# Altium PCB test_powersupply.pcbdoc
Units mm, origin at the board's own origin, x right, y up, seen from the top; angles counter-clockwise.
Board outline 32 x 52.5 mm, 2 copper layers (Top Layer, Bottom Layer); 28 components, 14 nets, 84 pads, 23 vias.
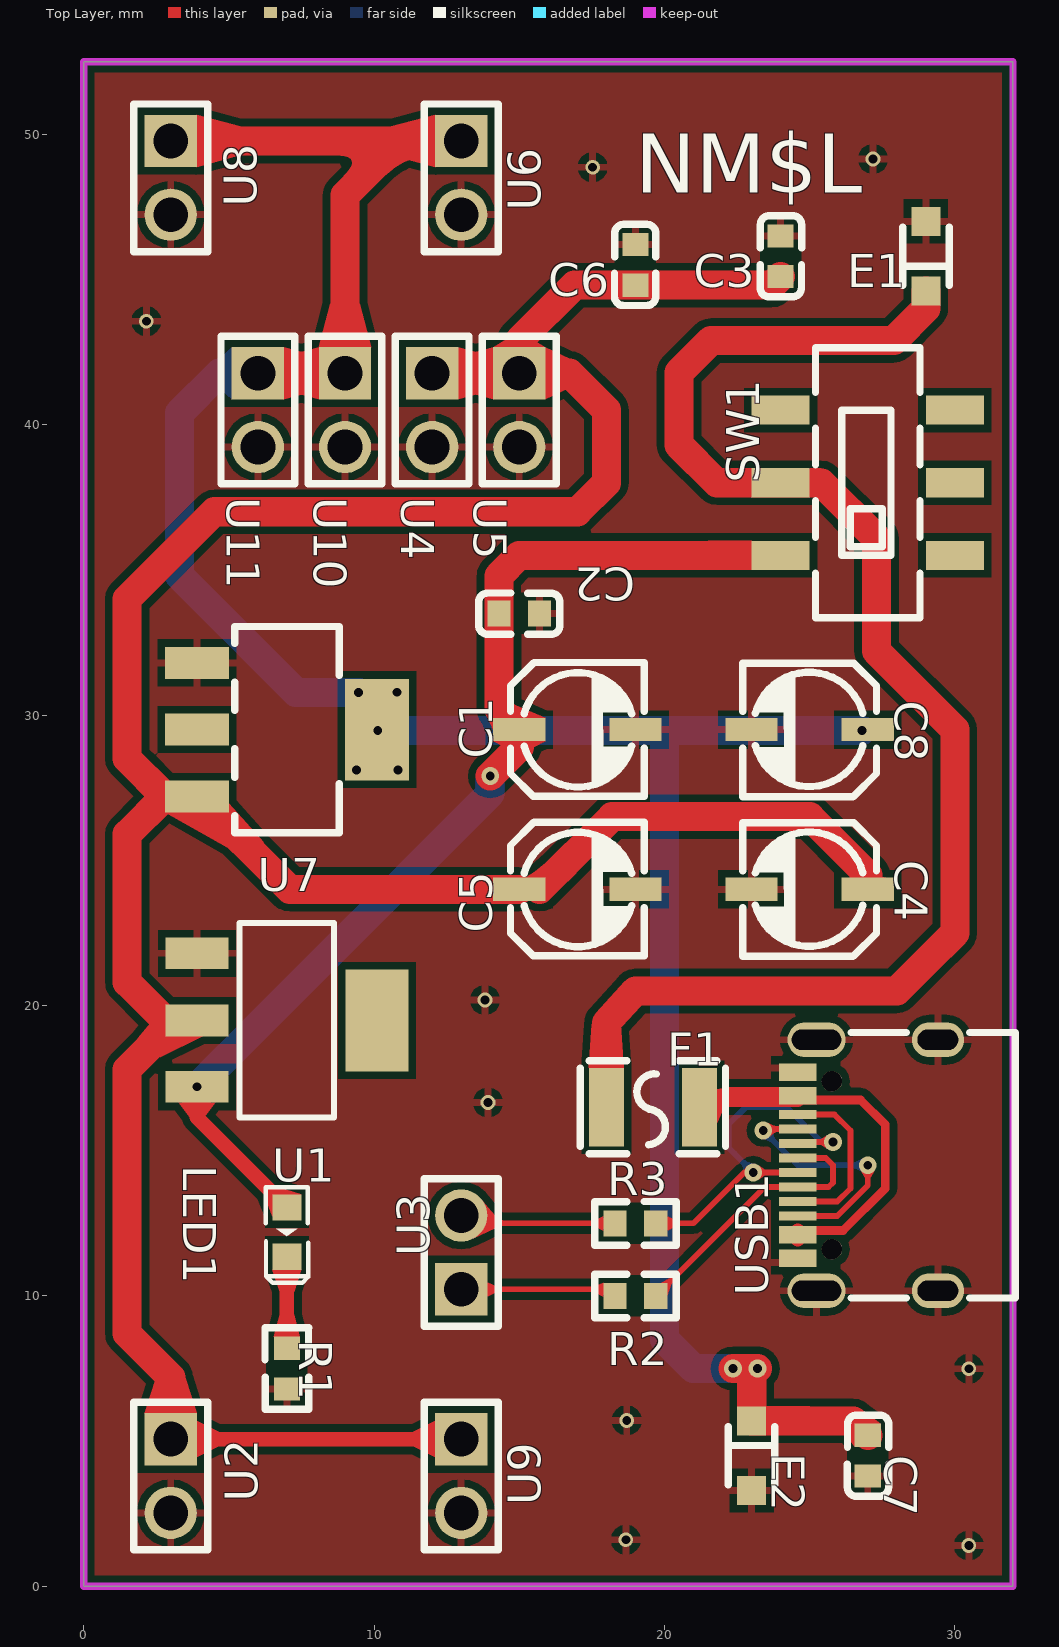
[diagram p0: Top Layer view]
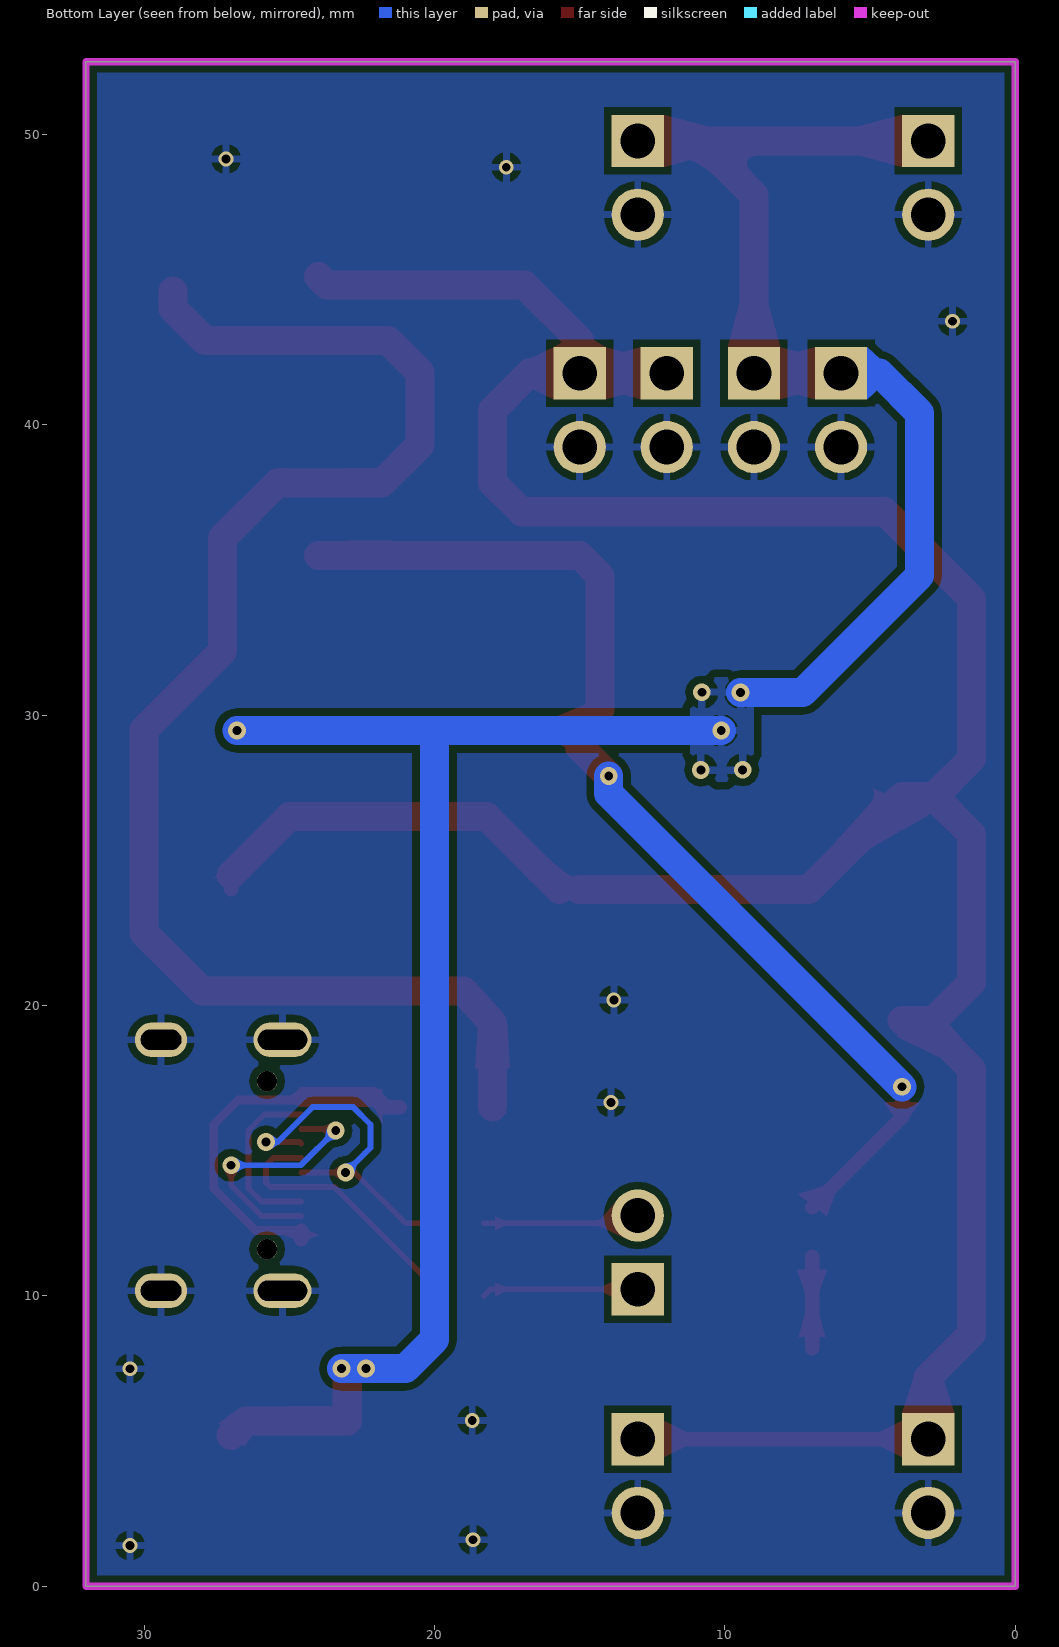
[diagram p1: Bottom Layer view, seen from below]

## Layer stack, top to bottom
Top Solder: solder mask 0.0102, Solder Resist, Dk 3.5
Top Layer: signal copper 0.0356
Dielectric1: dielectric 0.32, FR-4, Dk 4.8
Bottom Layer: signal copper 0.0356
Bottom Solder: solder mask 0.0102, Solder Resist, Dk 3.5

## Board outline
0,0 0,52.5 32,52.5 32,0

## Design rules (kind name [scope] priority, off if disabled: settings)
Clearance [All] p1: gap=0.254 ignorepadtopadclearanceinfootprint=FALSE except(0: Arc-Hole Track-Hole SMDPad-Hole THPad-Hole Via-Hole Fill-Hole Poly-Hole Region-Hole Text-Hole)
PolygonConnect [All] p1: connectstyle=Relief reliefconductorwidth=0.254 reliefentries=4 polygonreliefangle="90 Angle" airgapwidth=0.254
RoutingVias [All] p1: holewidth=0.711 width=1.27 viastyle="Through Hole" minholewidth=0.711 minwidth=1.27 maxholewidth=0.711 maxwidth=1.27
SolderMaskExpansion [All] p1: expansion=0.102
Width [All] p1: maxlimit=0.254 minlimit=0.254 preferedwidth=0.254
30 further rules are at their usual default settings.

## Components (designator, comment, footprint, x,y, rotation, side; value= is the part's Value field where it differs from the comment)
C1 "10uF" CAP-SMD_BD4.0-L4.3-W4.3-FD 17,29.5 r0 top
C2 "100nF" C0603 15,33.5 r180 top
C3 "100nF" C0603 24,45.8 r270 top
C4 "10uF" CAP-SMD_BD4.0-L4.3-W4.3-FD 25,24 r180 top
C5 "10uF" CAP-SMD_BD4.0-L4.3-W4.3-FD 17,24 r0 top
C6 "100nF" C0603 19,45.5 r90 top
C7 "100nF" C0603 27,4.5 r270 top
C8 "10uF" CAP-SMD_BD4.0-L4.3-W4.3-FD 25,29.5 r180 top
E1 "CESD5V0D3 ZA" SOD-323_L1.8-W1.3-LS2.5-RD 29,45.8 r90 top
E2 "CESD3V3D3" SOD-323_L1.8-W1.3-LS2.5-RD 23,4.5 r270 top
F1 "JK-SMD1210-050" F1210 19.6,16.5 r180 top
LED1 "LED-0603_R" LED0603_RED 7,12.2 r270 top
R1 "1K" R0603 7,7.5 r90 top
R2 "22" R0603 19,10 r180 top
R3 "22" R0603 19,12.5 r180 top
SW1 "SS-1260L-G2" SW-SMD_SS-1260L-G2 27,38 r90 top
U1 "AMS1117-5.0" SOT-223_L6.5-W3.5-P2.30-LS7.0-BR 7,19.5 r180 top
U2 "MTP125-1102S1" HDR-TH_2P-P2.54-V 3,3.8 r270 top
U3 "MTP125-1102S1" HDR-TH_2P-P2.54-V 13,11.5 r90 top
U4 "MTP125-1102S1" HDR-TH_2P-P2.54-V 12,40.5 r270 top
U5 "MTP125-1102S1" HDR-TH_2P-P2.54-V 15,40.5 r270 top
U6 "MTP125-1102S1" HDR-TH_2P-P2.54-V 13,48.5 r270 top
U7 "AMS1117-3.3" SOT-223-3_L6.5-W3.4-P2.30-LS7.0-BR 7,29.5 r180 top
U8 "MTP125-1102S1" HDR-TH_2P-P2.54-V 3,48.5 r270 top
U9 "MTP125-1102S1" HDR-TH_2P-P2.54-V 13,3.8 r270 top
U10 "MTP125-1102S1" HDR-TH_2P-P2.54-V 9,40.5 r270 top
U11 "MTP125-1102S1" HDR-TH_2P-P2.54-V 6,40.5 r270 top
USB1 "KH-TYPE-C-16P" USB-C-SMD_KH-TYPE-C-16P 27,14.5 r90 top

## Footprints (in the part's own frame and the unit in brackets; to place one, negate y for a bottom-side part, rotate by r counter-clockwise, add the part's x,y. Pads: shape width x height; smd on the part's side, far side on the other; paste and mask are expansions set on the pad)
C0603 [mm]
  rect 0.8x0.9 smd: 1(-0.7,0) 2(0.7,0)
  silkscreen extent -1.4,-0.7 1.4,0.72
CAP-SMD_BD4.0-L4.3-W4.3-FD [mm]
  rect 1.8x0.8 smd: 1(-2,0) 2(2,0)
  silkscreen extent -2.3,-2.29 2.3,2.31
F1210 [mm]
  rect 1.2x2.7 smd: 1(-1.6,0) 2(1.6,0)
  silkscreen extent -2.5,-1.6 2.5,1.6
HDR-TH_2P-P2.54-V [mm]
  rect 1.8x1.8 hole 1.2: 1(-1.27,0)
  round 1.8 hole 1.2: 2(1.27,0)
  silkscreen extent -2.54,-1.27 2.54,1.27
LED0603_RED [mm]
  rect 0.9x1 smd: 1(-0.85,0) 2(0.85,0)
  silkscreen extent -1.54,-0.73 1.75,0.73
R0603 [mm]
  rect 0.8x0.9 smd: 1(-0.7,0) 2(0.7,0)
  silkscreen extent -1.4,-0.75 1.4,0.76
SOD-323_L1.8-W1.3-LS2.5-RD [mm]
  rect 1x1 smd: 1(-1.2,0) 2(1.2,0)
  silkscreen extent -1,-0.8 1,0.8
SOT-223-3_L6.5-W3.4-P2.30-LS7.0-BR [mm]
  rect 2.2x1.1 smd: 1(3.099,-2.3) 2(3.099,0) 3(3.099,2.3)
  rect 2.2x3.5 smd: 4(-3.099,0)
  silkscreen extent -1.8,-3.55 1.8,3.55
SOT-223_L6.5-W3.5-P2.30-LS7.0-BR [mil]
  rect 85x43 smd: 1(122,-90.5) 2(122,0.5) 3(122,90.5)
  rect 85x138 smd: 4(-122,0.5)
  silkscreen extent -64,-132 64,132
SW-SMD_SS-1260L-G2 [mm]
  rect 1x2 smd: 1(-2.5,3) 2(0,3) 3(2.5,3) 4(-2.5,-3) 5(0,-3) 6(2.5,-3)
  silkscreen extent -4.65,-1.8 4.65,1.8
USB-C-SMD_KH-TYPE-C-16P [mm]
  oval 1.2x2 hole 0.7 slot 1.7 at 90 deg copper offset 0,0: 1(-4.32,1.765) 2(4.32,1.765)
  oval 1.2x1.8 hole 0.7 slot 1.4 at 90 deg copper offset 0,0: 3(-4.32,-2.415)
  oval 1.2x1.8 hole 0.7 slot 1.4 at 90 deg: 4(4.32,-2.415)
  rect 0.3x1.3 smd: A1(-3.35,2.415) A4(-2.55,2.415) A5(-1.25,2.415) A6(-0.25,2.415) A7(0.25,2.415) A8(1.25,2.415) A9(2.55,2.415) A12(3.35,2.415) B1(3.05,2.415) B4(2.25,2.415) B5(1.75,2.415) B6(0.75,2.415) B7(-0.75,2.415) B8(-1.75,2.415) B9(-2.25,2.415) B12(-3.05,2.415)
  round 0.7 hole 0.7 unplated: ""(-2.89,1.235) ""(2.89,1.235)
  silkscreen extent -4.57,-5.08 4.57,0.57

## Via types
v1: diameter 0.61, hole 0.305, Top Layer to Bottom Layer, 14 vias
v2: diameter 0.508, hole 0.305, Top Layer to Bottom Layer, tented both sides, 9 vias

## Nets (pads, with @x,y where several pads share a name; then routed paths per layer and width w, separated by ;. In a path a pad name is that pad's centre, name@x,y a point inside that pad or via, vN(x,y) a via of type N, cw(c..) or ccw(c..) an arc to the next point about the centre after c; other vN are vias at no path point)
+5V: C3.2 C4.1 C5.1 C6.1 U1.2 U2.1 U4.1 U5.1 U7.3 U9.1 | length 110.6
  Top Layer w0.5: U2.1 U9.1 ; C5.1@14.999,23.999 C5.1@15.7,23.999 ; C4.1 27,24.499
  Top Layer w1: U2.1 3,7.199 1.501,8.7 1.501,17.801 3.188,19.488 U1.2 ; U1.2@3.607,19.488 2.812,19.488 1.501,20.801 1.501,25.901 2.799,27.199 U7.3@3.901,27.199 ; U4.1 U5.1 ; C5.1@14.999,23.999 7.102,23.999 U7.3@3.901,27.199 ; C5.1@15.7,23.999 18.199,26.501 25.001,26.501 27,24.499 ; C3.2 23.701,44.801 C6.1 16.901,44.801 15.001,42.901 U5.1 ; U7.3@3.901,27.199 2.802,27.199 1.501,28.5 1.501,34.001 4.501,37.001 17,37.001 18.001,37.999 18.001,40.501 16.731,41.771 U5.1
F1_2: E1.1 F1.2 SW1.2 | length 51.6
  Top Layer w1: F1.2 18.001,19.401 18.999,20.501 28.001,20.501 28.999,21.499 30,22.5 30,29.5 27.3,32.2 27.3,36.099 25.4,37.999 24,37.999 21.801,37.999 20.5,39.3 20.5,41.799 21.6,42.899 27.899,42.899 28.999,44.001 E1.1
GND: C1.2 C2.1 C3.1 C4.2 C5.2 C6.2 C7.2 C8.2 E1.2 E2.2 R1.1 U1.1 U2.2 U4.2 U5.2 U6.2 U7.1 U8.2 U9.2 U10.2 U11.2 USB1.1 USB1.2 USB1.3 USB1.4 USB1.A1 USB1.A12 USB1.B1 USB1.B12
  other v2: 30.48,1.406 18.669,1.604 18.7,5.715 30.48,7.493 13.921,16.661 13.823,20.193 2.159,43.561 17.526,48.863 27.178,49.149
LED1_1: C1.1 C2.2 LED1.1 SW1.1 U1.3 | length 37.9
  Top Layer w0.5: v1(3.901,17.201) 3.901,16.15 LED1.1
  Top Layer w1: v1(14,27.9) 15.001,28.901 15.001,29.5 14.3,30.201 C2.2 14.295,34.789 14.999,35.5 SW1.1
  Bottom Layer w1: v1(3.901,17.201) 14,27.3 v1(14,27.9)
LED1_2: LED1.2 R1.2 | length 3.1
  Top Layer w0.5: R1.2 LED1.2@7,11.349
S$68: 
U3_1: R2.2 U3.1 | length 5.4
  Top Layer w0.2: U3.1@13,10.229 18.07,10.229 R2.2
U3_2: R3.2 U3.2 | length 5.4
  Top Layer w0.2: U3.2@13,12.769 13.269,12.5 R3.2
U7_4: C7.1 C8.1 E2.1 U6.1 U7.4 U8.1 U10.1 U11.1 | length 95.6
  Top Layer w1: U8.1 U6.1 10.871,49.769 8.999,47.9 U10.1 U11.1 ; v1(22.358,7.499) 23.2,7.499 23,7.301 E2.1 26.5,5.7 C7.1
  Bottom Layer w1: U11.1 4.671,41.771 3.299,40.399 3.299,34.799 7.32,30.78 v1(9.463,30.78) ; v1(10.125,29.47) v1(26.8,29.47) 20,29.47 20,8.5 21,7.5 v1@23.2,7.499
  other v1: 23.2,7.5 9.39,28.113 10.827,28.107 10.793,30.787
USB1_A5: USB1.A5 USB1.B5 | length 6
  Top Layer w0.2: USB1.A5@24.585,13.249 25.951,13.249 26.401,13.699 26.401,15.7 25.85,16.249 USB1.B5@24.585,16.249
USB1_A6: R3.1 USB1.A6 USB1.B6 | length 13.2
  Top Layer w0.2: R3.1 21.001,12.5 22.751,14.25 v1(23.058,14.25) USB1.A6 ; USB1.B6 24.635,15.299 v1@25.799,15.299
  Bottom Layer w0.2: v1(23.058,14.25) 22.408,14.9 22.2,15.101 22.2,15.901 22.799,16.501 24.201,16.501 25.4,15.299 v1@25.799,15.299
  other v1: 25.8,15.3
USB1_A7: R2.1 USB1.A7 USB1.B7 | length 9.6
  Top Layer w0.2: R2.1 23.449,13.75 USB1.B7 25.649,13.75 25.799,13.9 25.799,14.499 25.55,14.751 USB1.A7
USB1_A8: USB1.A8 USB1.B8 | length 8.9
  Top Layer w0.2: v1(23.4,15.7) 23.449,15.749 USB1.A8@24.585,15.749 ; USB1.B8@24.585,12.749 25.951,12.749 27,13.801 v1@27,14.499
  Bottom Layer w0.2: v1(23.4,15.7) 24.6,14.5 v1(27,14.5)
USB1_A9: F1.1 USB1.A4 USB1.A9 USB1.B4 USB1.B9 | length 16.9
  Top Layer w0.3: F1.1 21.549,16.501 22.101,17.049 24.585,17.049 USB1.B4 26.751,16.749 27.6,15.901 27.6,13.699 26.149,12.251 USB1.B9
  Top Layer w0.5: F1.1 21.75,16.501 21.999,16.749 USB1.B4 ; USB1.A4@24.585,11.949 USB1.B9
pads on no net: SW1.3 SW1.4 SW1.5 SW1.6 U1.4 U7.2 USB1.

## Polygon pours and split planes (outlines as drawn)
U7_4 on Bottom Layer "Bottom Layer-U7_4" (solid, pour order 0): 9,31.3 9,27.7 11.2,27.7 11.2,31.3
GND on Bottom Layer "Bottom Layer-GND" (solid, pour order 4): 0.2,52.3 0.2,0.2 31.8,0.2 31.8,52.3
GND on Top Layer "Top Layer-GND" (solid, pour order 2): 0.2,0.2 31.8,0.2 31.8,52.3 0.2,52.3

## Keep-outs
Keep-Out Layer:
  the board outline again, w0.254

## Other copper
Top Layer:
  region net U3_2: 13.729,13.297 13.432,11.98 14.173,12.4 14.218,12.6
  region net USB1_A6: 22.856,14.021 22.856,14.479 22.75,14.35 22.75,14.15
  region net USB1_A6: 23.26,14.021 23.26,14.479 23.473,14.35 23.473,14.15
  region net USB1_A6: 25.598,15.071 25.598,15.529 25.385,15.4 25.385,15.2
  region net USB1_A8: 23.628,15.497 23.573,15.951 23.8,15.85 23.824,15.65
  region net USB1_A8: 27.229,14.298 26.771,14.298 26.9,14.085 27.1,14.085
  region net LED1_1: 3.673,17 4.13,17 4.151,16.786 3.651,16.786
  region net LED1_1: 15.9,29.1 14.1,29.1 14.5,28.9 15.5,28.9
  region net LED1_1: 14.1,29.481 15.9,29.9 14.874,30.335 13.947,29.848
  region net +5V: 26.375,24.4 27.625,24.4 27.25,24.5 26.75,24.5
  region net +5V: 15.566,24.4 15.9,23.6 16.401,24.347 16.193,24.846
  region net LED1_1: 23,35 23,36 21.5,36 21.5,35
  region net F1_2: 23,37.5 23,38.5 21.8,38.5 21.8,37.5
  region net F1_2: 25,38.5 25,37.5 25.4,37.5 25.4,38.5
  region net LED1_2: 7.5,10.9 6.5,10.9 6.75,10.15 7.25,10.15
  region net LED1_1: 6.5,12.749 7.499,13.5 6.624,13.78 6.22,13.477
  region net F1_2: 17.4,17.85 18.601,17.85 18.5,19.35 17.5,19.35
  region net USB1_A9: 21.799,17.124 21.799,16.374 22.1,16.838 21.994,17.156
  region net USB1_A9: 21.799,17.174 21.799,15.924 22,16.396 21.823,16.927
  region net F1_2: 29.5,44.1 28.5,44.1 28.5,44 29.5,44
  region net +5V: 2.801,26.65 2.801,27.75 2.801,27.699 2.801,26.699
  region net +5V: 5.001,26.96 2.801,26.65 4.955,25.439 6.195,25.613
  region net +5V: 2.801,26.65 2.801,27.75 2.8,27.7 2.8,26.7
  region net U7_4: 23.5,6.2 23.5,5.2 25,5.2 25,6.2
  region net U7_4: 22.5,6.2 23.5,6.2 23.5,7.3 22.5,7.3
  region net USB1_A9: 23.96,12.1 25.21,12.1 24.835,12.25 24.335,12.25
  region net USB1_A9: 25.21,12.1 23.96,12.1 24.335,11.95 24.835,11.95
  region net USB1_A9: 24.21,16.9 24.96,16.9 24.735,17.05 24.435,17.05
  region net USB1_A9: 24.96,16.9 24.21,16.9 24.435,16.75 24.735,16.75
  region net +5V: 4.097,18.941 2.822,20.033 1.868,18.875 2.63,18.223
  region net +5V: 2.822,18.941 2.822,20.033 2.813,19.987 2.813,18.987
  region net LED1_1: 4.526,16.655 3.276,16.655 3.651,16.149 4.151,16.149
  region net U7_4: 26.55,4.8 27.45,5.6 26.874,6.033 26.146,5.346
  region net U3_1: 17.9,9.98 17.9,10.45 17.6,10.33 17.6,10.13
  region net USB1_A7: 19.885,10.45 20.1,9.999 20.241,10.4 20.15,10.591
  region net U3_2: 17.9,12.25 17.9,12.75 17.6,12.6 17.6,12.4
  region net USB1_A6: 20.1,12.75 20.1,12.25 20.4,12.4 20.4,12.6
  region net LED1_2: 6.55,8.6 7.45,8.6 7.25,9.35 6.75,9.35
  region net +5V: 15.9,42.67 15.9,40.87 16.73,41.27 16.73,42.27
  region net +5V: 14.1,40.87 14.1,42.67 12.6,42.27 12.6,41.27
  region net +5V: 14.1,42.67 15.9,42.67 15.5,42.9 14.5,42.9
  region net U7_4: 8.1,40.87 8.1,42.67 6.6,42.27 6.6,41.27
  region net U7_4: 8.1,42.67 9.9,42.67 9.5,44.17 8.5,44.17
  region net U7_4: 3.9,50.67 3.9,48.87 5.4,49.27 5.4,50.27
  region net U7_4: 12.1,48.87 12.1,50.67 10.6,50.27 10.6,49.27
  region net U7_4: 12.1,48.87 12.1,50.67 10.87,50.27 10.87,49.27
  region net +5V: 12.1,4.445 12.1,5.695 11.35,5.32 11.35,4.82
  region net +5V: 12.9,42.67 12.9,40.87 14.4,41.27 14.4,42.27
  region net U7_4: 6.9,42.67 6.9,40.87 8.4,41.27 8.4,42.27
  region net U3_1: 13.9,10.48 13.9,9.98 14.2,10.13 14.2,10.33
  region net +5V: 2.1,5.97 3.9,5.97 3.5,7.2 2.5,7.2
  region net +5V: 3.9,5.695 3.9,4.445 4.65,4.82 4.65,5.32
Bottom Layer:
  region net USB1_A6: 23.077,14.554 22.754,14.231 22.694,14.473 22.835,14.614
  region net USB1_A6: 25.598,15.071 25.598,15.529 25.4,15.4 25.4,15.2
  region net USB1_A8: 23.704,15.719 23.381,15.396 23.623,15.336 23.764,15.477
  region net USB1_A8: 26.798,14.271 26.798,14.729 26.585,14.6 26.585,14.4
  region net U7_4: 5.1,40.87 5.1,42.67 4.67,42.27 4.67,41.27

## Silkscreen, mask and mechanical layers (free items; w line width, h text height)
Top Overlay:
  text "NM$L" at 19,47.984 h2.03
Document:
  lines w0.003: 16.015,26.225 16.065,26.275